# EAGLE board BitBang-Buoy Eagle Board BT version (EAGLE 8.6.3)
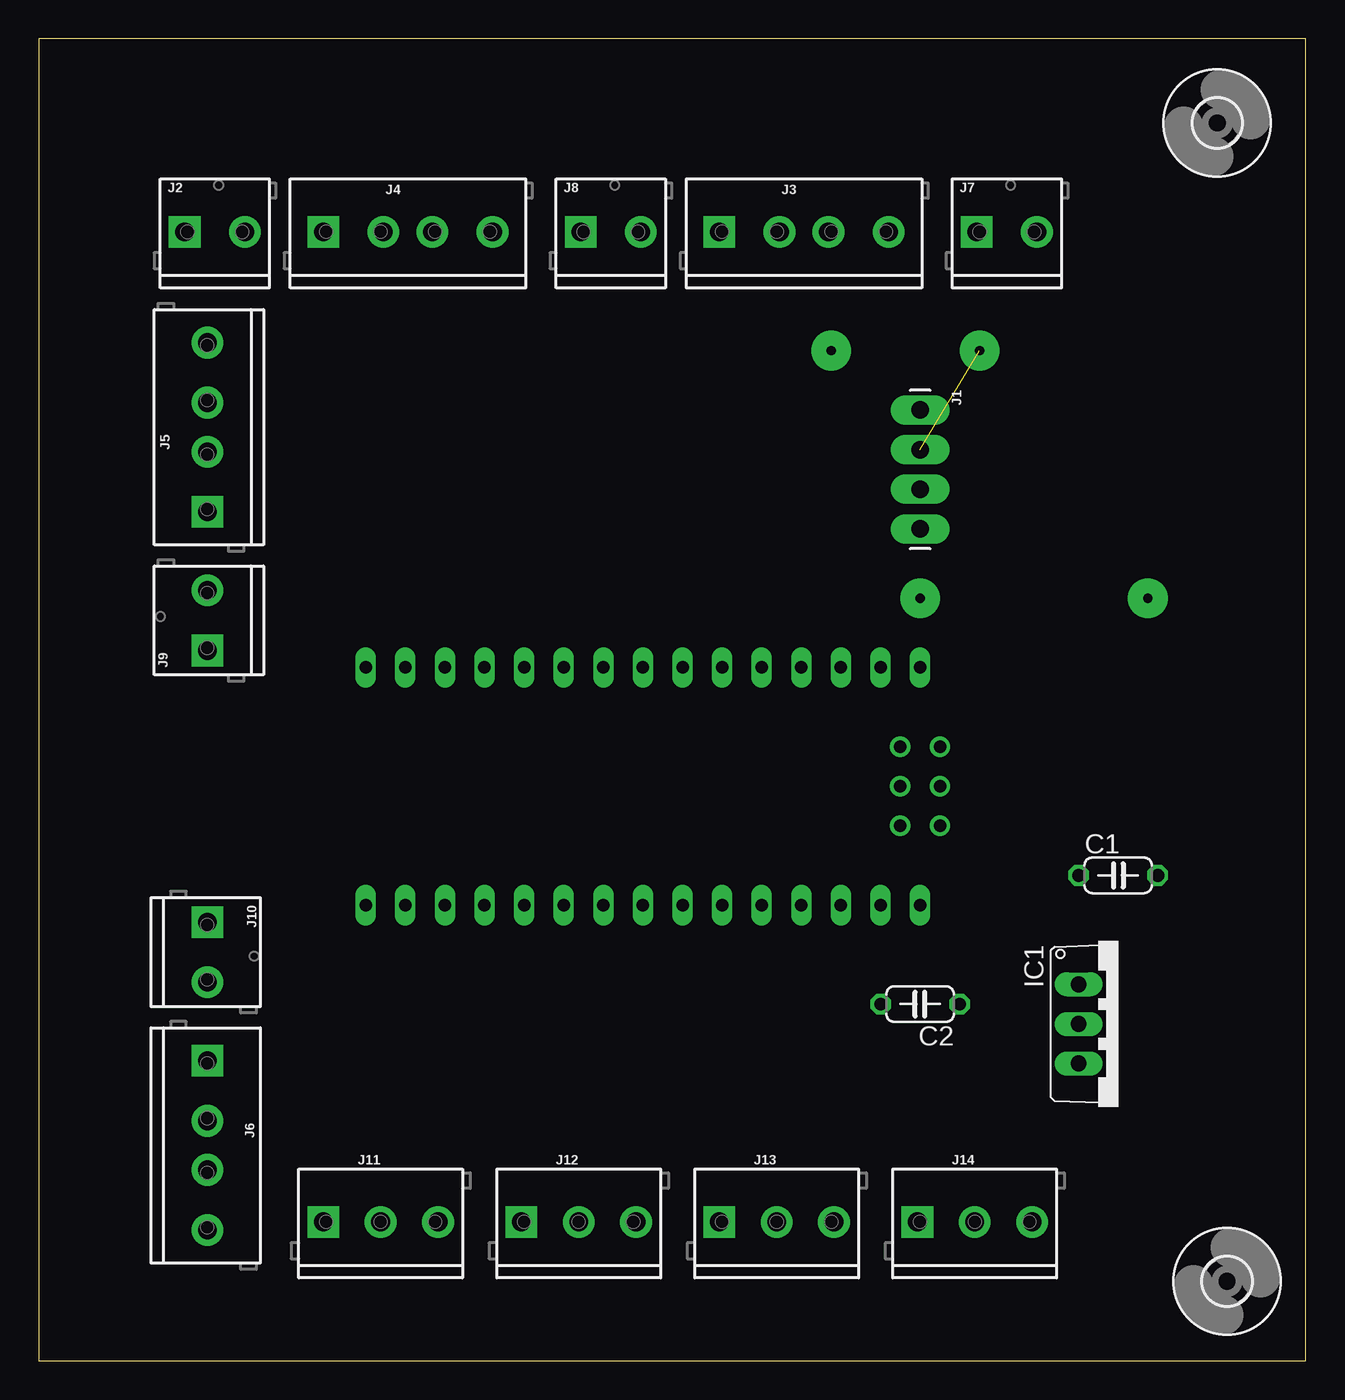
[diagram p0: board, top side]
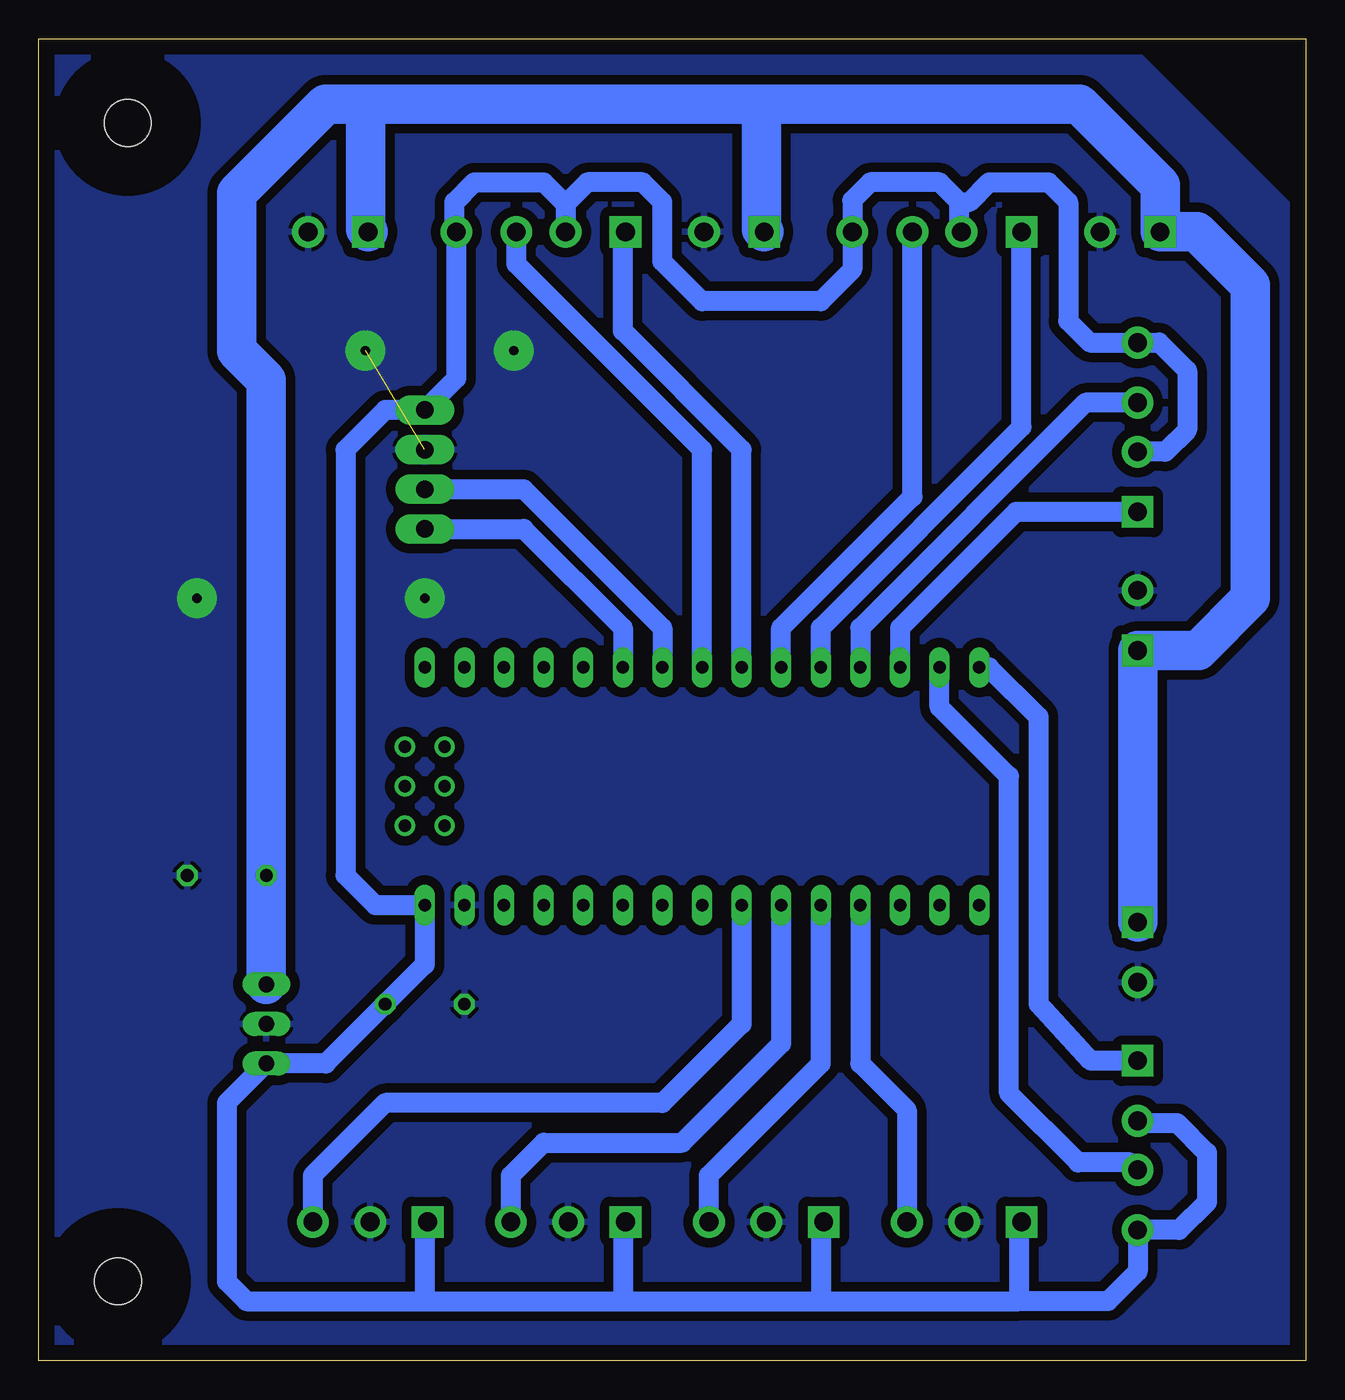
[diagram p1: board, bottom side, seen from below]

Size 81.26 x 84.76 mm. Coordinates in mm from the lower left corner, seen from the top.
Outline: 0,0 81.26,0 81.26,84.76 0,84.76 0,0
Copper layers (1*16): Top 0.035mm / dielectric 1.5mm / Bottom 0.035mm
Design rules "default": minimum track width 6mil, minimum drill 0.35mm, track to track 6mil, track to pad 6mil, pad to pad 6mil, via to via 6mil, smd to smd 6mil, copper to edge 40mil, drill to drill 6mil, minimum pad ring 10mil, minimum via ring 8mil, stop-mask expansion 4mil, vias tented up to drill 0mil, thermal gap 10mil

## Footprints (pad centres in the part's own frame; a part is rotated, then mirrored left to right if it is on the bottom)
C050-024X044 = drill 0.813 octagon: 1 -2.54,0; 2 2.54,0
3,0 = hole 3: 0,0
TO220V = drill 1.016 long: 1 -2.54,-2.54; 2 0,-2.54; 3 2.54,-2.54
1X04_LONGPADS = drill 1.118 pad 1.88 long: 1 0,0; 2 2.54,0; 3 5.08,0; 4 7.62,0
SCREWTERMINAL-3.5MM-2_LOCK = drill 1.2 pad 2.032 square: 1 -0.178,0 | drill 1.2 pad 2.032: 2 3.678,0
SCREWTERMINAL-3.5MM-4_LOCK = drill 1.2 pad 2.032 square: 1 -0.178,0 | drill 1.2 pad 2.032: 2 3.678,0; 3 6.822,0; 4 10.678,0
SCREWTERMINAL-3.5MM-3_LOCK.007S = drill 1.2 pad 2.032 square: 1 -0.178,0 | drill 1.2 pad 2.032: 2 3.5,0; 3 7.178,0
NANO = drill 0.8 long: 3.3V -10.16,24.13; 5V -10.16,-1.27; A0 -10.16,19.05; A1 -10.16,16.51; A2 -10.16,13.97; A3 -10.16,11.43; A4 -10.16,8.89; A5 -10.16,6.35; A6 -10.16,3.81; A7 -10.16,1.27; AREF -10.16,21.59; D2 5.08,1.27; D3 5.08,3.81; D4 5.08,6.35; D5 5.08,8.89; D6 5.08,11.43; D7 5.08,13.97; D8 5.08,16.51; D9 5.08,19.05; D10 5.08,21.59; D11 5.08,24.13; D12 5.08,26.67; D13 -10.16,26.67; GND -10.16,-6.35; GND1 5.08,-1.27; RAW -10.16,-8.89; RST -10.16,-3.81; RST1 5.08,-3.81; RX1 5.08,-6.35; TX0 5.08,-8.89 | drill 0.8: ICSP1 -5.08,-10.16; ICSP2 -5.08,-7.62; ICSP3 -2.54,-10.16; ICSP4 -2.54,-7.62; ICSP5 0,-10.16; ICSP6 0,-7.62

## Placement (x,y rotation side)
C1  [C050-024X044]  69.22,31.12 0 top
C2  [C050-024X044]  56.52,22.86 180 top
H1  MOUNT-HOLE3.0  [3,0]  76.2,5.08 0 top
H2  MOUNT-HOLE3.0  [3,0]  75.56,79.38 0 top
IC1  7805TV  [TO220V]  69.22,21.59 270 top
J1  [1X04_LONGPADS]  56.52,60.96 270 top
J2  [SCREWTERMINAL-3.5MM-2_LOCK]  9.53,72.39 0 top
J3  [SCREWTERMINAL-3.5MM-4_LOCK]  43.81,72.39 0 top
J4  [SCREWTERMINAL-3.5MM-4_LOCK]  18.41,72.39 0 top
J5  [SCREWTERMINAL-3.5MM-4_LOCK]  10.79,54.61 90 top
J6  [SCREWTERMINAL-3.5MM-4_LOCK]  10.79,19.05 270 top
J7  [SCREWTERMINAL-3.5MM-2_LOCK]  60.33,72.39 0 top
J8  [SCREWTERMINAL-3.5MM-2_LOCK]  34.92,72.39 0 top
J9  [SCREWTERMINAL-3.5MM-2_LOCK]  10.79,45.72 90 top
J10  [SCREWTERMINAL-3.5MM-2_LOCK]  10.79,27.94 270 top
J11  [SCREWTERMINAL-3.5MM-3_LOCK.007S]  18.41,8.89 0 top
J12  [SCREWTERMINAL-3.5MM-3_LOCK.007S]  31.11,8.89 0 top
J13  [SCREWTERMINAL-3.5MM-3_LOCK.007S]  43.81,8.89 0 top
J14  [SCREWTERMINAL-3.5MM-3_LOCK.007S]  56.52,8.89 0 top
U$1  NANO  [NANO]  47.62,39.37 90 top

## Library data of the parts
C1 C2 = rcl; SPICEPREFIX: C
H1 H2 = holes
IC1 = linear
J1 = SparkFun-Connectors; PROD_ID: CONN-09696
J2 J7-J10 = SparkFun-Connectors; PROD_ID: CONN-08399
J3-J6 = SparkFun-Connectors
J11-J14 = SparkFun-Connectors; PROD_ID: CONN-08288; SF_ID: PRT-08235
U$1 = Arduino-clone

## Nets
5V_R: C2.1 IC1.3 J1.1 J3.2 J3.4 J4.2 J4.4 J5.2 J5.4 J6.2 J6.4 J11.1 J12.1 J13.1 J14.1 U$1.RAW
12V: C1.1 IC1.1 J2.1 J7.1 J8.1 J9.1 J10.1
GND: C1.2 C2.2 IC1.2 J1.2 J2.2 J7.2 J8.2 J9.2 J10.2 J11.2 J12.2 J13.2 J14.2 U$1.GND
N$4: J1.3 U$1.D4
N$5: J1.4 U$1.D3
N$6: J3.3 U$1.D5
N$7: J3.1 U$1.D6
N$8: J4.3 U$1.D7
N$9: J4.1 U$1.D8
N$10: J5.3 U$1.D9
N$11: J5.1 U$1.D10
N$12: J6.3 U$1.D11
N$13: J6.1 U$1.D12
N$14: J11.3 U$1.A0
N$15: J12.3 U$1.A1
N$16: J13.3 U$1.A2
N$17: J14.3 U$1.A3

## Tracks (layer width: path | path; a pad name or v marks a point on that pad's centre or on a via)
5V_R
  Bottom 1.27: J11.1 18.41,8.71 18.41,3.81 | 56.52,3.81 43.81,3.81 | 43.81,3.81 31.11,3.81 | 31.11,3.81 18.41,3.81 | J14.1 56.52,8.71 56.52,3.81 | J13.1 43.81,8.71 43.81,3.81 | J12.1 31.11,8.71 31.11,3.81 | J1.1 54.49,62.98 J3.4 54.61,72.51 54.61,74.3 53.34,75.56 48.89,75.56 47.49,74.16 | 18.41,3.81 12.7,3.81 10.79,5.71 J6.4 8.14,8.37 6.35,10.16 6.35,13.34 8.25,15.24 10.66,15.24 J6.2 | 56.52,3.81 67.94,3.81 69.22,5.08 69.22,16.51 IC1.3 62.86,19.05 C2.1 56.52,25.4 U$1.RAW 59.69,29.21 61.59,31.12 61.59,58.42 59.06,60.96 J1.1 | J1.1 58.42,60.96 | J5.2 9.02,58.29 7.62,59.69 7.62,63.5 9.41,65.29 J5.4 13.85,65.29 15.24,66.67 15.24,74.3 16.51,75.56 20.32,75.56 21.59,74.3 22.23,74.3 | J4.2 22.23,72.52 22.23,74.3 | 22.23,74.3 23.5,75.56 27.94,75.56 29.09,74.41 J4.4 29.09,69.97 31.11,67.95 38.73,67.95 41.28,70.48 41.28,74.3 42.55,75.56 46.09,75.56 47.49,74.16 | 47.49,74.16 J3.2
12V
  Bottom 2.54: J10.1 J9.1 6.91,45.54 3.56,48.89 3.56,68.96 6.98,72.39 J2.1 9.35,75.39 14.53,80.57 34.92,80.57 | IC1.1 C1.1 66.67,62.86 68.58,64.77 68.58,74.85 62.86,80.57 60.33,80.57 | 60.33,80.57 34.92,80.57 | J8.1 34.92,72.57 34.92,80.57 | J7.1 60.33,72.57 60.33,80.57
GND  (via drill 0.6 pad 2.54)  (1 unrouted)
  other vias: 56.52,48.89 71.12,48.89 50.8,64.77 60.33,64.77
  pour Bottom (isolate 0.61): 0,0 81.28,0 81.28,84.45 81.28,85.09 17.14,85.09 12.17,85.09 arc45 11.99,85.02 0,73.02
N$4
  Bottom 1.27: J1.3 50.17,55.88 41.28,46.99 U$1.D4
N$5
  Bottom 1.27: J1.4 50.17,53.34 43.81,46.99 U$1.D3
N$6
  Bottom 1.27: U$1.D5 38.73,58.42 50.64,70.32 J3.3
N$7
  Bottom 1.27: U$1.D6 36.2,58.42 43.81,66.04 43.81,72.21 J3.1
N$8
  Bottom 1.27: U$1.D7 33.66,46.99 25.24,55.41 J4.3
N$9
  Bottom 1.27: U$1.D8 31.11,46.99 18.24,59.87 J4.1
N$10
  Bottom 1.27: J5.3 14.13,61.43 28.57,46.99 U$1.D9
N$11
  Bottom 1.27: J5.1 18.59,54.43 26.04,46.99 U$1.D10
N$12
  Bottom 1.27: J6.3 11.27,12.7 14.61,12.7 19.05,17.14 19.05,37.46 23.5,41.91 U$1.D11
N$13
  Bottom 1.27: J6.1 13.79,19.23 17.14,22.86 17.14,41.27 20.32,44.45 U$1.D12
N$14
  Bottom 1.27: U$1.A0 28.57,19.05 25.59,16.07 J11.3
N$15
  Bottom 1.27: J12.3 38.29,11.87 31.11,19.05 U$1.A1
N$16
  Bottom 1.27: U$1.A2 33.66,20.32 40,13.97 48.89,13.97 50.99,11.87 J13.3
N$17
  Bottom 1.27: U$1.A3 36.2,21.59 41.28,16.51 59.06,16.51 63.69,11.87 J14.3